# Altium PCB board.PcbDoc
Units mm, origin at the board's own origin, x right, y up, seen from the top; angles counter-clockwise.
Board outline 46.4 x 24.4 mm, 2 copper layers (Top Layer, Bottom Layer), stack 1.57 mm thick; 70 components, 62 nets, 297 pads, 179 vias.
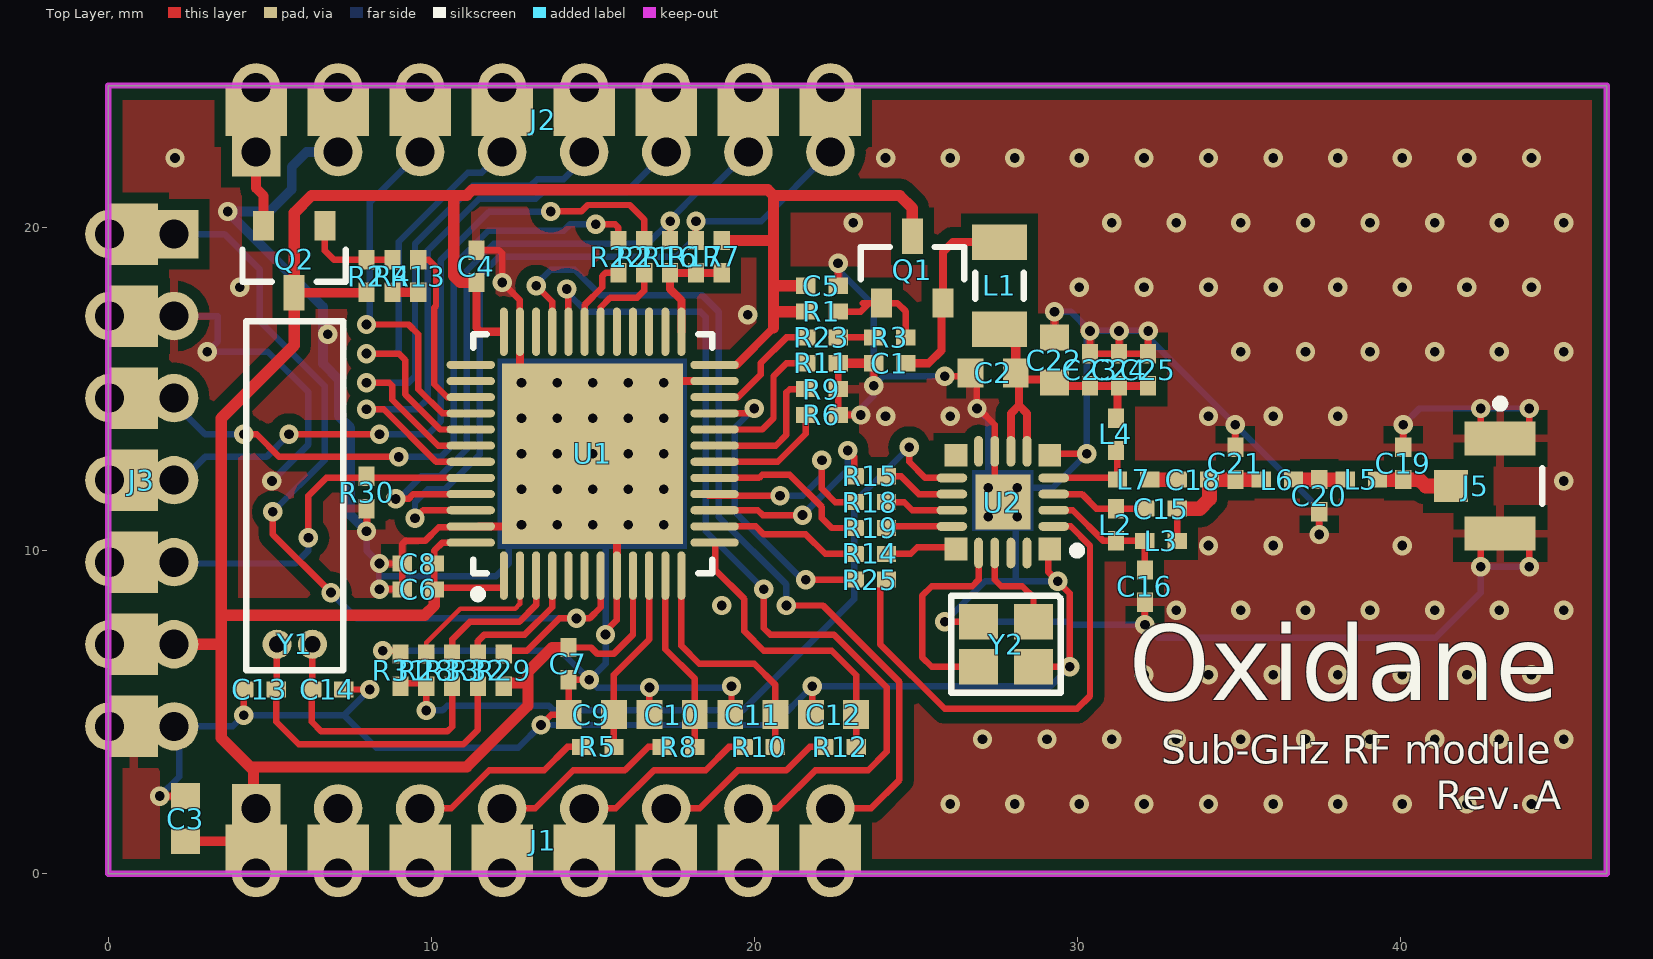
[diagram p0: Top Layer view]
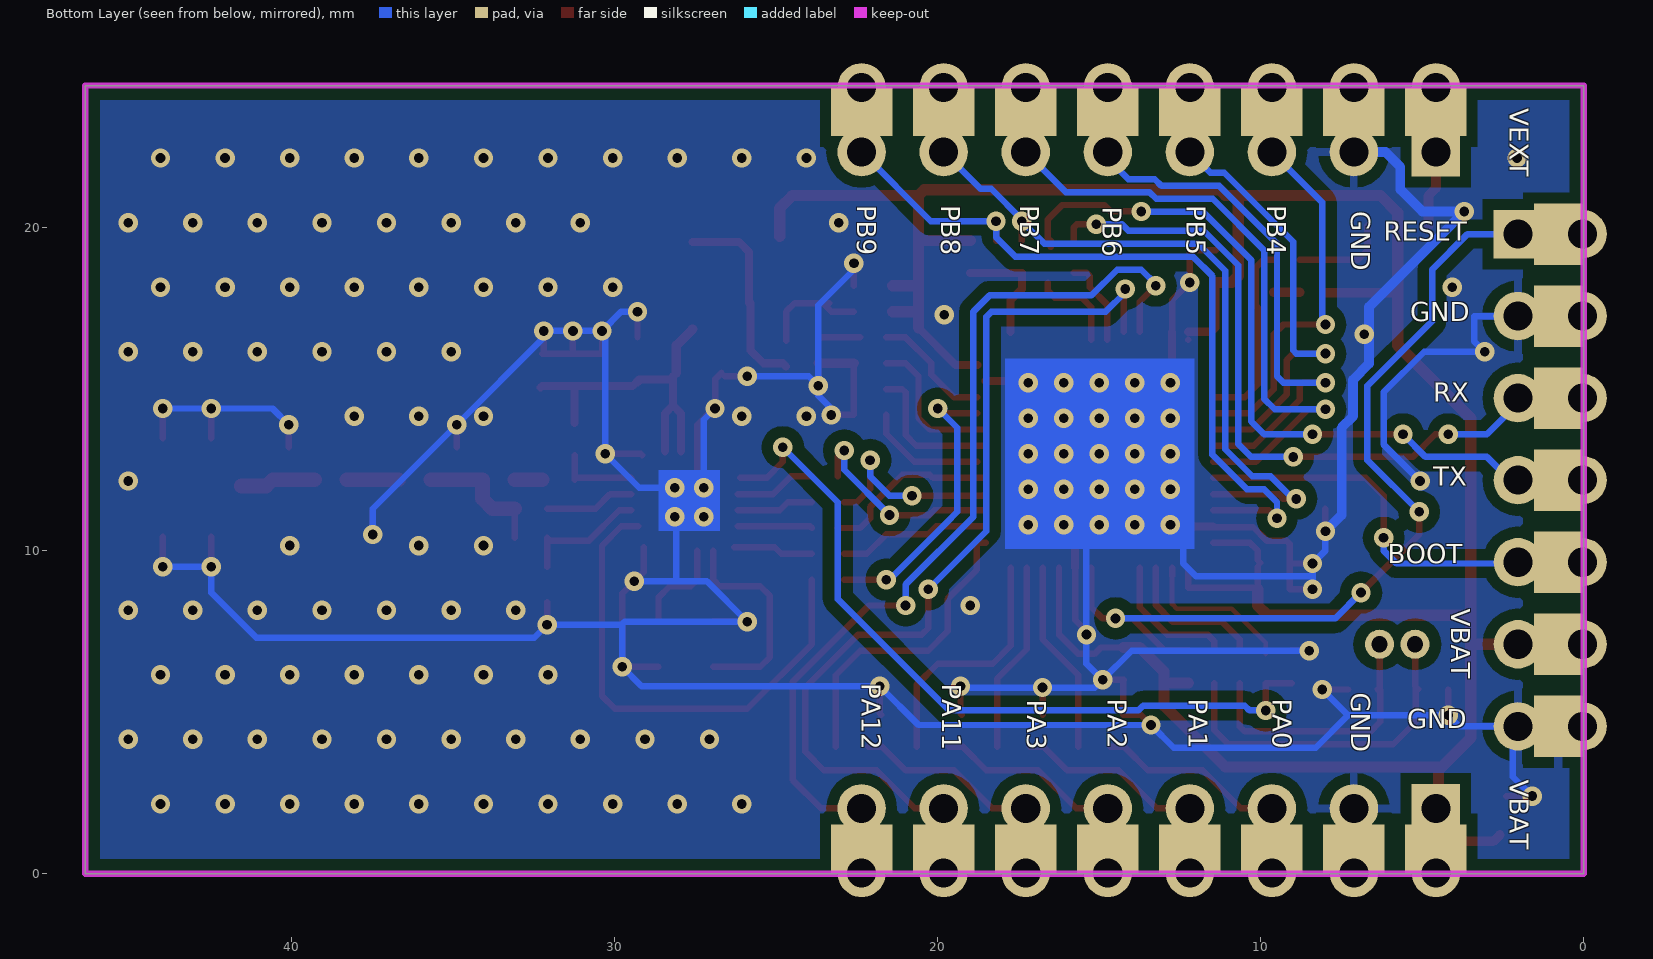
[diagram p1: Bottom Layer view, seen from below]
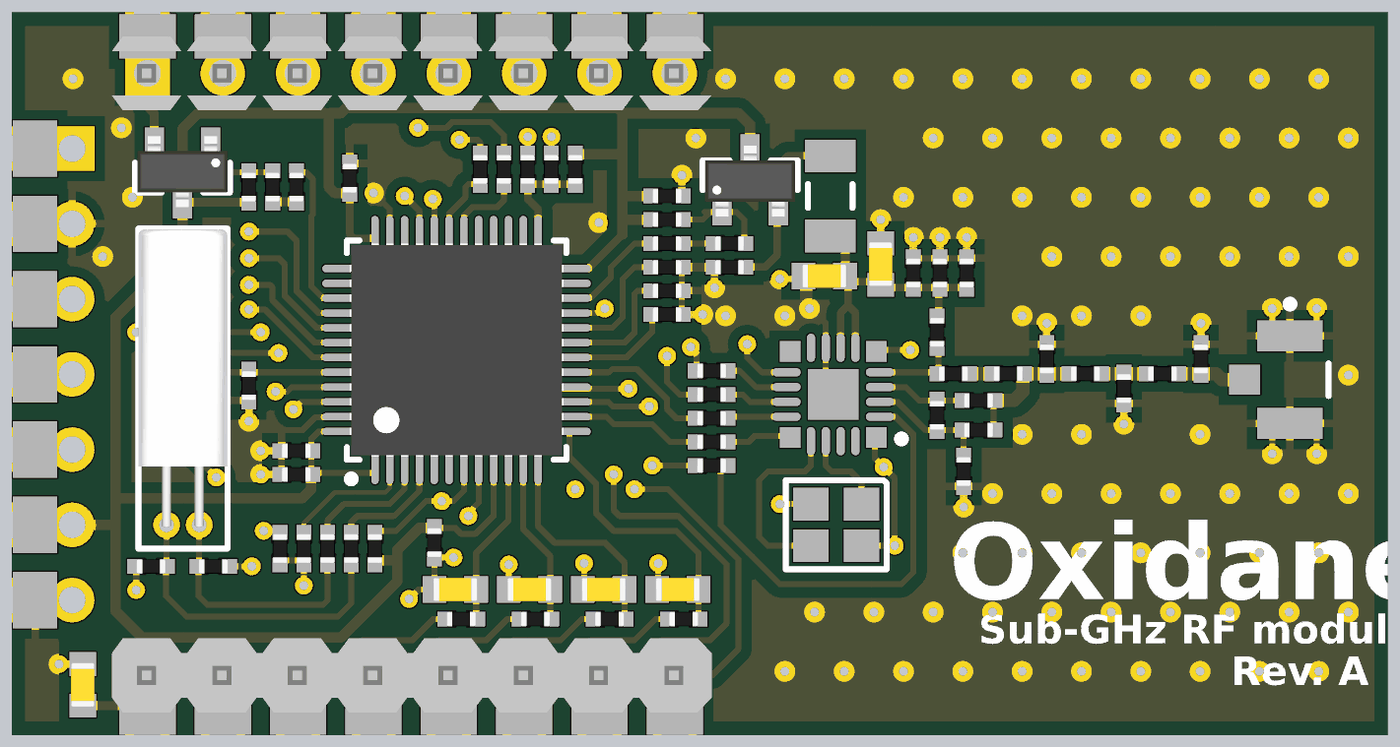
[diagram p2: 3D render of the assembled board from above, using the file's embedded part models]

## Layer stack, top to bottom
Top Solder: solder mask 0.01, Solder Resist, Dk 3.5
Top Layer: signal copper 0.035
Dielectric1: core 1.5, FR-4, Dk 4.2
Bottom Layer: signal copper 0.035
Bottom Solder: solder mask 0.01, Solder Resist, Dk 3.5

## Board outline
0,0 0,24.4 46.4,24.4 46.4,0

## Design rules (kind name [scope] priority, off if disabled: settings)
AssemblyTestPointUsage [All] p1 off:
AssemblyTestpoint [All] p1 off: testpointundercomponent=TRUE minsize=1.016 maxsize=2.54 preferedsize=1.524 minholesize=0 maxholesize=1.016 preferedholesize=0.813 testpointgrid=0.025 usegrid=TRUE gridtolerance=0 allowsidetop=TRUE allowsidebottom=TRUE
Clearance [All] p1: gap=0.2 ignorepadtopadclearanceinfootprint=FALSE except(0.35: Arc-Fill Arc-Poly Arc-Region Track-Fill Track-Poly Track-Region SMDPad-Fill SMDPad-Poly SMDPad-Region THPad-Fill THPad-Poly THPad-Region Via-Fill Via-Poly Via-Region Fill-Fill Fill-Poly Fill-Region Poly-Poly Poly-Region Region-Region)
ComponentClearance ComponentClearance_Headers [InComponent('J1') or InComponent('J2') or InComponent('J3') vs InComponent('J1') or InComponent('J2') or InComponent('J3')] p1: gap=0 collisioncheckmode=3 verticalgap=0.254 showdistances=FALSE
ComponentClearance ComponentClearance_logo [HasFootprint('Develer_logo_30x12mm_PCB_NOTE') vs HasFootprint('Develer_logo_30x12mm_TB_Top')] p2: gap=0 collisioncheckmode=3 verticalgap=0 showdistances=FALSE
ComponentClearance [All] p3: gap=0.25 collisioncheckmode=3 verticalgap=0.25 showdistances=FALSE
DiffPairsRouting [All] p1: maxlimit=0.25 minlimit=0.25 mostfreqgap=0.25 toplayer_minwidth=0.25 toplayer_maxwidth=0.25 toplayer_prefwidth=0.25 bottomlayer_minwidth=0.25 bottomlayer_maxwidth=0.25 bottomlayer_prefwidth=0.25 maxuncoupledlength=12.7
FabricationTestPointUsage [All] p1 off: valid=0 allowmultiple=FALSE
Height [All] p1: minheight=0 maxheight=25 prefheight=12.5
HoleSize [All] p1: absolutevalues=TRUE maxlimit=10 minlimit=0.2 maxpercent=80.000 minpercent=20.000
HoleToHoleClearance [All] p1: gap=0.25 allowstackedmicrovias=TRUE
MinimumSolderMaskSliver [All] p1: minsoldermaskwidth=0.1
PlaneClearance [All] p1: clearance=0.5
PlaneConnect PlaneConnect_via [isvia] p1: planeconnectstyle=Direct reliefexpansion=0.508 reliefentries=4 reliefconductorwidth=0.254 reliefairgap=0.254
PlaneConnect [All] p2: planeconnectstyle=Relief reliefexpansion=0.6 reliefentries=4 reliefconductorwidth=0.6 reliefairgap=0.3
PolygonConnect PolygonConnect_via [isvia] p1: connectstyle=Direct reliefconductorwidth=0.254 reliefentries=4 polygonreliefangle="90 Angle" airgapwidth=0.254
PolygonConnect [All] p2: connectstyle=Relief reliefconductorwidth=0.25 reliefentries=4 polygonreliefangle="90 Angle" airgapwidth=0.35
RoutingCorners [All] p1: cornerstyle=45-Degree minsetback=2.5 maxsetback=2.5
RoutingVias [All] p1: holewidth=0.3 width=0.6 viastyle="Through Hole" minholewidth=0.2 minwidth=0.3 maxholewidth=0.5 maxwidth=1
SilkToSilkClearance [All] p1: silktosilkclearance=0.1
SilkToSolderMaskClearance [IsPad] p1: minsilkscreentomaskgap=0.15 clearancetoexposedcopper=TRUE
SolderMaskExpansion SolderMaskExpansion_via [isVia] p1: expansion=-10
SolderMaskExpansion [All] p2: expansion=0.05
UnRoutedNet [All] p1: checkbadconnections=TRUE
Width [All] p1: maxlimit=5 minlimit=0.15 preferedwidth=0.2
15 further rules are at their usual default settings.

## Classes and differential pairs
component class connectors: C1 C2 J1 J3 L1 Q1 Q2 R1 R2 R3 R4
component class microcontroller: C3 C4 C5 C6 C7 C8 C9 C10 C11 C12 C13 C14 R5 R6 R7 R8 R9 R10 R11 R12 R13 R14 R15 R16 R17 R18 R19 R21 R22 R23 R25 R28 R30 R31 R32 R33 U1 Y1
component class radio: C15 C16 C18 C19 C20 C21 C22 C23 C24 C25 J5 L2 L3 L4 L5 L6 L7 U2 Y2

## Components (designator, comment, footprint, x,y, rotation, side; value= is the part's Value field where it differs from the comment)
C1 "10nF" 0402_[1005] 24.2,15.8 r0 top
C2 "10uF" 0603_[1608] 27.4,15.5 r0 top
C3 "4.7uF" 0603_[1608] 2.4,1.7 r90 top
C4 "100nF" 0402_[1005] 11.4,18.8 r270 top
C5 "100nF" 0402_[1005] 22.1,18.2 r180 top
C6 "100nF" 0402_[1005] 9.6,8.8 r0 top
C7 "100nF" 0402_[1005] 14.25,6.5 r90 top
C8 "100nF" 0402_[1005] 9.6,9.6 r0 top
C9 "NP" 0603_[1608] 14.96,4.92 r180 top value=100nF
C10 "NP" 0603_[1608] 17.46,4.92 r180 top value=100nF
C11 "NP" 0603_[1608] 19.96,4.92 r180 top value=100nF
C12 "NP" 0603_[1608] 22.46,4.92 r180 top value=100nF
C13 "6.8pF" 0402_[1005] 4.7,5.7 r0 top
C14 "6.8pF" 0402_[1005] 6.8,5.7 r180 top
C15 "1.2pF" 0402_[1005] 32.6,11.3 r180 top
C16 "3.0pF" 0402_[1005] 32.1,8.9 r90 top
C18 "33pF" 0402_[1005] 33.6,12.2 r180 top
C19 "5.1pF" 0402_[1005] 40.1,12.7 r270 top
C20 "10pF" 0402_[1005] 37.5,11.7 r90 top
C21 "5.1pF" 0402_[1005] 34.9,12.7 r270 top
C22 "2.2uF" 0603_[1608] 29.3,15.9 r270 top
C23 "100nF" 0402_[1005] 30.4,15.6 r270 top
C24 "100pF" 0402_[1005] 31.3,15.6 r270 top
C25 "33pF" 0402_[1005] 32.2,15.6 r270 top
J1 "Header 8x1" HDR8x1-H#1 13.49,1.895 r0 top
J2 "Header 8x1" HDR8x1-H#2 13.49,22.465 r0 top locked
J3 "Debug" HDR7x1-H 1.84,12.165 r270 top
J5 "u.FL" U.FL_COAXIAL_2.6x2.6MM_STRAIGHT_SMD 43.1,12 r270 top
L1 "10uH" 1206_[3216] 27.6,18.2 r270 top
L2 "18nH" 0402_[1005] 31.2,10.8 r90 top
L3 "22nH" 0402_[1005] 32.6,10.3 r180 top
L4 "120nH" 0402_[1005] 31.2,13.6 r90 top
L5 "6.8nH" 0402_[1005] 38.8,12.2 r180 top
L6 "6.8nH" 0402_[1005] 36.2,12.2 r180 top
L7 "8.2nH" 0402_[1005] 31.75,12.2 r180 top
Q1 "IRLML5103" SOT-23-MOS 24.9,18.7 r90 top
Q2 "IRLML5103" SOT-23-MOS 5.76,19.02 r270 top
R1 "4k7" 0402_[1005] 22.1,17.4 r180 top
R2 "4k7" 0402_[1005] 8,18.5 r270 top
R3 "1k" 0402_[1005] 24.2,16.6 r0 top
R4 "1k" 0402_[1005] 8.8,18.5 r90 top
R5 "0" 0402_[1005] 15.16,3.92 r0 top
R6 "10k" 0402_[1005] 22.1,14.2 r0 top
R7 "NP" 0402_[1005] 19,19.1 r90 top value=0
R8 "0" 0402_[1005] 17.66,3.92 r0 top
R9 "10k" 0402_[1005] 22.1,15 r0 top
R10 "0" 0402_[1005] 20.16,3.92 r0 top
R11 "10k" 0402_[1005] 22.1,15.8 r0 top
R12 "0" 0402_[1005] 22.66,3.92 r0 top
R13 "22" 0402_[1005] 9.6,18.5 r270 top
R14 "22" 0402_[1005] 23.6,9.9 r180 top
R15 "22" 0402_[1005] 23.6,12.3 r180 top
R16 "NP" 0402_[1005] 17.4,19.1 r270 top value=10K
R17 "NP" 0402_[1005] 18.2,19.1 r270 top value=10K
R18 "22" 0402_[1005] 23.6,11.5 r180 top
R19 "22" 0402_[1005] 23.6,10.7 r180 top
R21 "22" 0402_[1005] 16.6,19.1 r270 top
R22 "22" 0402_[1005] 15.8,19.1 r270 top
R23 "22" 0402_[1005] 22.1,16.6 r0 top
R25 "22" 0402_[1005] 23.6,9.1 r0 top
R28 "22" 0402_[1005] 9.85,6.3 r270 top
R29 "10k" 0402_[1005] 12.25,6.3 r90 top
R30 "10k" 0402_[1005] 8,11.8 r90 top
R31 "10k" 0402_[1005] 9.05,6.3 r270 top
R32 "0" 0402_[1005] 11.45,6.3 r270 top
R33 "0" 0402_[1005] 10.65,6.3 r90 top
U1 "STM32L15xCxx6" QFN50P700X700X60_HS-49N 15,13 r90 top locked
U2 "Si4455" QFN50P300X300X90_HS-21N 27.7,11.5 r180 top
Y1 "32.768 KHz" KX-38 5.875,11.6 r90 top
Y2 "26MHz" CRYSTAL_2.5X2MM_4P_SMD 27.8,7.1 r180 top

## Footprints (in the part's own frame and the unit in brackets; to place one, negate y for a bottom-side part, rotate by r counter-clockwise, add the part's x,y. Pads: shape width x height; smd on the part's side, far side on the other; paste and mask are expansions set on the pad)
0402_[1005] [mm] "Chip Capacitor, Body 1.0x0.5mm, IPC High Density"
  rect 0.6x0.5 smd: 1(-0.5,0) 2(0.5,0)
  body extent -0.5,-0.25 0.5,0.25, height 0.42
0603_[1608] [mm] "Chip Capacitor, Body 1.6x0.8mm, IPC High Density"
  rect 0.8x0.9 smd: 1(-0.7,0) 2(0.7,0)
  body extent -0.75,-0.4 0.75,0.4, height 0.67
1206_[3216] [mm] "Chip Capacitor, Body 3.2x1.6mm, IPC High Density"
  rect 1.1x1.7 smd: 1(-1.35,0) 2(1.35,0)
  silkscreen extent -0.4,-0.75 0.4,0.75, body extent -1.7,-0.9 1.7,0.9, height 1.3
CRYSTAL_2.5X2MM_4P_SMD [mm] "quarz crystal smd 4 lead"
  rect 1.2x1.1 smd: 1(-0.85,-0.7) 2(0.85,-0.7) 3(0.85,0.7) 4(-0.85,0.7)
  silkscreen extent -1.7,-1.5 1.7,1.5, body extent -1.27,-0.92 1.23,1.08, height 1.25
HDR7x1-H [mm] "Header 7x1, THD, dual-line with half-cut holes"
  round 1.5 hole 0.9: 1(-7.635,-1.8) 2(-5.095,-1.8) 2(-5.095,0.2) 3(-2.555,0.2) 3(-2.555,-1.8) 4(-0.015,0.2) 4(-0.015,-1.8) 5(2.525,0.2) 5(2.525,-1.8) 6(5.065,-1.8) 6(5.065,0.2) 7(7.605,-1.8) 7(7.605,0.2)
  rect 1.9x1.5 smd: 1(-7.635,-1.05) 2(-5.095,-1.05) 3(-2.555,-1.05) 4(-0.015,-1.05) 5(2.525,-1.05) 6(5.065,-1.05) 7(7.605,-1.05)
  rect 1.9x1.5 smd far side: 1(-7.635,-1.05) 2(-5.095,-1.05) 3(-2.555,-1.05) 4(-0.015,-1.05) 5(2.525,-1.05) 6(5.065,-1.05) 7(7.605,-1.05)
  rect 1.5x1.5 hole 0.9: 1(-7.635,0.2)
HDR8x1-H#1 [mm] "Header 8x1, THD, dual-line with half-cut holes"
  round 1.5 hole 0.9: 1(-8.91,-1.875) 2(-6.37,-1.875) 2(-6.37,0.125) 3(-3.83,-1.875) 3(-3.83,0.125) 4(-1.29,-1.875) 4(-1.29,0.125) 5(1.25,-1.875) 5(1.25,0.125) 6(3.79,-1.875) 6(3.79,0.125) 7(6.33,-1.875) 7(6.33,0.125) 8(8.87,-1.875) 8(8.87,0.125)
  rect 1.9x1.5 smd: 1(-8.91,-1.125) 2(-6.37,-1.125) 3(-3.83,-1.125) 4(-1.29,-1.125) 5(1.25,-1.125) 6(3.79,-1.125) 7(6.33,-1.125) 8(8.87,-1.125)
  rect 1.9x1.5 smd far side: 1(-8.91,-1.125) 2(-6.37,-1.125) 3(-3.83,-1.125) 4(-1.29,-1.125) 5(1.25,-1.125) 6(3.79,-1.125) 7(6.33,-1.125) 8(8.87,-1.125)
  rect 1.5x1.5 hole 0.9: 1(-8.91,0.125)
  body extent -10.11,-1.12 10.11,1.38, height 8.2
HDR8x1-H#2 [mm] "Header 8x1, THD, dual-line with half-cut holes"
  rect 1.5x1.5 hole 0.9: 1(-8.91,-0.125)
  rect 1.9x1.5 smd far side: 1(-8.91,1.125) 2(-6.37,1.125) 3(-3.83,1.125) 4(-1.29,1.125) 5(1.25,1.125) 6(3.79,1.125) 7(6.33,1.125) 8(8.87,1.125)
  rect 1.9x1.5 smd: 1(-8.91,1.125) 2(-6.37,1.125) 3(-3.83,1.125) 4(-1.29,1.125) 5(1.25,1.125) 6(3.79,1.125) 7(6.33,1.125) 8(8.87,1.125)
  round 1.5 hole 0.9: 1(-8.91,1.875) 2(-6.37,-0.125) 2(-6.37,1.875) 3(-3.83,-0.125) 3(-3.83,1.875) 4(-1.29,-0.125) 4(-1.29,1.875) 5(1.25,-0.125) 5(1.25,1.875) 6(3.79,-0.125) 6(3.79,1.875) 7(6.33,-0.125) 7(6.33,1.875) 8(8.87,-0.125) 8(8.87,1.875)
  body extent -10.11,-1.38 10.11,1.12, height 3
KX-38 [mm] "Through-hole cylindrical quartz crystal"
  round 0.9 hole 0.5: 1(-4.5,0.65) 2(-4.5,-0.45)
  silkscreen extent -5.3,-1.4 5.5,1.6, body extent -4.67,-1.39 5.47,1.6, height 3.22
QFN50P300X300X90_HS-21N [mm] "QFN, 20-Leads, Body 3.00x3.00mm, Pitch 0.50mm, Thermal Pad 1.70x1.70mm, IPC Medium Density"
  rect 0.7x0.7 smd: 1(-1.45,1.45) 6(-1.45,-1.45) 11(1.45,-1.45) 16(1.45,1.45)
  oval 0.95x0.275 smd: 2(-1.575,0.75) 3(-1.575,0.25) 4(-1.575,-0.25) 5(-1.575,-0.75) 12(1.575,-0.75) 13(1.575,-0.25) 14(1.575,0.25) 15(1.575,0.75)
  oval 0.275x0.95 smd: 7(-0.75,-1.575) 8(-0.25,-1.575) 9(0.25,-1.575) 10(0.75,-1.575) 17(0.75,1.575) 18(0.25,1.575) 19(-0.25,1.575) 20(-0.75,1.575)
  rect 1.7x1.7 smd: 21(0,0)
  silkscreen extent -2.43,1.38 -2.18,1.62, body extent -1.5,-1.5 1.5,1.5, height 0.9
QFN50P700X700X60_HS-49N [mm] "QFN, 48-Leads, Body 7,00x7,00mm, Pitch 0,50mm, Thermal Pad 5,60x5,60mm, IPC Medium Density"
  oval 1.5x0.25 smd: 1(-3.775,2.75) 2(-3.775,2.25) 3(-3.775,1.75) 4(-3.775,1.25) 5(-3.775,0.75) 6(-3.775,0.25) 7(-3.775,-0.25) 8(-3.775,-0.75) 9(-3.775,-1.25) 10(-3.775,-1.75) 11(-3.775,-2.25) 12(-3.775,-2.75) 25(3.775,-2.75) 26(3.775,-2.25) 27(3.775,-1.75) 28(3.775,-1.25) 29(3.775,-0.75) 30(3.775,-0.25) 31(3.775,0.25) 32(3.775,0.75) 33(3.775,1.25) 34(3.775,1.75) 35(3.775,2.25) 36(3.775,2.75)
  oval 0.25x1.5 smd: 13(-2.75,-3.775) 14(-2.25,-3.775) 15(-1.75,-3.775) 16(-1.25,-3.775) 17(-0.75,-3.775) 18(-0.25,-3.775) 19(0.25,-3.775) 20(0.75,-3.775) 21(1.25,-3.775) 22(1.75,-3.775) 23(2.25,-3.775) 24(2.75,-3.775) 37(2.75,3.775) 38(2.25,3.775) 39(1.75,3.775) 40(1.25,3.775) 41(0.75,3.775) 42(0.25,3.775) 43(-0.25,3.775) 44(-0.75,3.775) 45(-1.25,3.775) 46(-1.75,3.775) 47(-2.25,3.775) 48(-2.75,3.775)
  rect 5.6x5.6 smd: 49(0,0)
  silkscreen extent -4.47,-3.7 3.7,3.7, body extent -3.6,-3.6 3.6,3.6, height 0.6
SOT-23-MOS [mm] "SOT23, 3-Leads, Body 2.9x1.3mm, Pitch 0.95mm, Lead Span 2.5mm, IPC High Density"
  rect 0.9x0.65 smd: 1(-1.038,0.95) 3(-1.038,-0.95)
  rect 1.1x0.65 smd: 2(1.038,0)
  silkscreen extent -0.3,-1.6 0.7,1.6, body extent -1.2,-1.52 1.2,1.52, height 1.22
U.FL_COAXIAL_2.6x2.6MM_STRAIGHT_SMD [mm] "SMD, 3-Leads, Body 2.6x2.6mm (HRS-U.FL-R-SMT-1(10)_V)"
  rect 1.05x2.2 smd: 1(-1.475,0) 2(1.475,0)
  rect 1x1.05 smd: 3(0,-1.525)
  silkscreen extent -2.67,-0.12 0.55,1.3, body extent -1.3,-1.3 1.3,1.3, height 1.25

## Part data
C1 C2 C4 C5 C6 C7 C8 C9 C10 C11 C12 C13 C14 C15 C16 C18 C19 C20 C21 C22 C23 C24 C25: library part C, "Capacitor"
C3: library part CPOL, "Polarized capacitor"
J1 J2: library part "HDR 8x1", "Pin header, 8x1"
J3: library part "HDR 7x1", "Pin header, 7x1"
J5: "u.FL antenna connector"
L1 L2 L3 L4 L5 L6 L7: library part L, "Inductor"
Q1 Q2: library part PMOS, "P-channel MOSFET"
R1 R2 R3 R4 R5 R6 R7 R8 R9 R10 R11 R12 R13 R14 R15 R16 R17 R18 R19 R21 R22 R23 R25 R28 R29 R30 R31 R32 R33: library part R, "Resistor"
U1: "Ultra-low-power 32-bit MCU ARM®-based Cortex®-M3, 128KB Flash, 16KB SRAM, 4KB EEPROM, LCD, USB, ADC, DAC"
U2: "Low-current OOK/(G)FSK sub-GHz transceiver"
Y1: library part XTAL, "Crystal oscillator"
Y2: library part XTAL-4, "Crystal oscillator, 4-pin"

## Via types
v1: diameter 0.6, hole 0.3, Top Layer to Bottom Layer, 179 vias

## Nets (pads, with @x,y where several pads share a name; then routed paths per layer and width w, separated by ;. In a path a pad name is that pad's centre, name@x,y a point inside that pad or via, vN(x,y) a via of type N, cw(c..) or ccw(c..) an arc to the next point about the centre after c; other vN are vias at no path point)
BOOT0: J3.5 R30.2 U1.44 | length 11.4
  Top Layer w0.2: v1(6.2,10.4) 6.2,11.7 6.75,12.25 U1.44@11.475,12.25
  Bottom Layer w0.2: J3.5@2.165,9.6 5.8,9.6 6.2,10 v1(6.2,10.4)
DRX: J3.3 R22.1 | length 21.3
  Top Layer w0.2: v1(4.2,13.6) 4.6,13.6 5.3,12.9 v1(9,12.9) ; v1(15.1,20.1) 15.7,20.1 15.8,20 R22.1
  Bottom Layer w0.2: J3.3@2.04,14.72 2.04,14.56 3,13.6 v1(4.2,13.6) ; v1(9,12.9) 10.3,12.9 10.7,13.3 10.7,18.831 11.769,19.9 14.1,19.9 14.3,20.1 v1(15.1,20.1)
DTX: J3.4 R21.1 | length 22.1
  Top Layer w0.2: v1(5.6,13.6) v1(8.4,13.6) ; v1(13.7,20.5) 14.651,20.5 14.851,20.7 16.149,20.7 16.6,20.249 R21.1 ; R21.1@16.5,19.4 R21.1@16.5,19.6
  Bottom Layer w0.2: J3.4@2.04,12.18 2.28,12.18 3,12.9 4.9,12.9 v1(5.6,13.6) ; v1(8.4,13.6) 9.9,13.6 10.3,14 10.3,18.997 11.793,20.49 13.69,20.49 v1(13.7,20.5)
GND: C1.1 C2.1 C3.2 C4.1 C5.1 C6.1 C7.1 C8.1 C9.2 C10.2 C11.2 C12.2 C13.1 C14.1 C16.1 C19.1 C20.1 C21.1 C22.1 C23.1 C24.1 C25.1 J1.2 J2.2 J3.2 J3.7 J5.1 J5.2 R6.2 R9.2 R11.2 R30.1 R31.1 U1.8 U1.23 U1.35 U1.47 U1.49 U2.1 U2.6 U2.9 U2.21 Y2.2 Y2.4 | length 209.7
  Top Layer w0.2: v1(1.6,2.4) C3.2 ; v1(4.2,4.9) C13.1 ; C14.1 v1(8.1,5.7) ; v1(8,10.6) R30.1 ; v1(8.4,8.8) C6.1 C8.1 ; v1(8.4,9.6) C8.1 ; v1(8.5,6.9) R31.1@9.05,6.9 ; C4.1 12.1,19.3 12.2,19.2 v1(12.2,18.3) 12.75,17.75 U1.35 ; U1.47@11.475,10.75 11.45,10.725 10.238,10.725 9.813,10.3 9.2,10.3 9.1,10.2 C8.1 ; U1.49@12.75,15.25 v1(12.8,15.2) ; v1(12.8,10.8) v1(13.9,11.9) v1(15,13) ; v1(13.4,4.6) 13.72,4.92 C9.2 14.26,5.99 C7.1 v1(14.9,6) ; v1(13.9,14.1) v1(15,13) ; v1(15.4,7.4) 15.4,7.5 15.75,7.85 U1.8 U1.8@15.75,9.475 ; v1(16.1,14.1) v1(15,13) ; C10.2 v1(16.76,5.76) ; v1(17.2,15.2) U1.49@17.25,15.25 ; C11.2 19.3,4.96 v1(19.3,5.8) ; C12.2 21.8,4.96 v1(21.8,5.8) ; R11.2 R9.2 R6.2 v1(23.3,14.2) ; C5.1 v1(22.6,18.9) ; v1(23.7,15.1) C1.1 ; v1(25.9,7.8) Y2.2 ; v1(25.9,15.4) C2.1@26.6,15.4 ; C2.1 26.9,15.3 v1(26.9,14.4) 26.95,14.4 27.45,13.9 U2.9 27.45,11.75 U2.21 ; Y2.4 v1(29.775,6.4) 29.775,8.675 v1(29.4,9.05) 29.1,9.35 U2.1@29.1,10.1 ; U2.6 29.2,13 v1(30.3,13) ; C22.1 v1(29.3,17.4) ; C23.1 v1(30.4,16.8) ; C23.1@30.45,16.1 C24.1 ; v1(31.3,16.8) C24.1 ; v1(32.1,7.7) C16.1 ; v1(32.2,16.8) C25.1 ; C25.1@32.25,16.1 C25.1 ; C21.1 v1(34.9,13.9) ; v1(37.5,10.5) C20.1 ; C19.1 v1(40.1,13.9) ; v1(42.5,9.5) J5.2@42.5,10.425 ; J5.1@42.5,13.475 v1(42.5,14.4) ; v1(44,9.5) J5.2@44,10.425 ; J5.1@44,13.475 v1(44,14.4) ; C24.1 C25.1
  Top Layer w0.25: U1.47@11.475,10.75 12.75,10.75 v1(12.8,10.8) ; U1.49@12.75,15.25 U1.35 ; v1(12.8,15.2) v1(13.9,14.1) ; v1(15,13) 15.75,12.25 U1.8@15.75,9.475 ; v1(16.1,14.1) v1(17.2,15.2) ; U1.49@17.25,15.25 U1.23@18.525,15.25
  Top Layer w0.3: R11.2 C1.1
  Bottom Layer w0.2: v1(1.6,2.4) 2.2,3 2.2,4.4 2.04,4.56 3.86,4.56 v1(4.2,4.9) 7.3,4.9 ; J3.2@2.04,17.26 3.4,17.26 3.4,16.485 v1(3.07,16.155) 4.945,16.155 6.2,14.9 6.2,13.285 v1(5.07,12.155) ; v1(8,10.6) 8,10 v1(8.4,9.6) 8.4,9.2 ; v1(8.1,5.7) 7.3,4.9 ; v1(8.4,8.8) 8.4,9.2 ; v1(8.5,6.9) 14,6.9 v1(14.9,6) ; 12.4,11 12.4,9.6 12,9.2 8.4,9.2 ; 15.6,11.3 15.4,11.1 v1(15.4,7.4) 15.4,6.5 v1(14.9,6) ; v1(19.3,5.8) 19.26,5.76 v1(16.76,5.76) 15.14,5.76 v1(14.9,6) ; v1@22.4,18.9 23.7,17.6 v1(23.7,15.1) ; v1@23.1,14.2 23.7,14.8 v1(23.7,15.1) ; v1(25.9,15.4) 24,15.4 v1(23.7,15.1) ; v1(26.9,14.4) 27.25,14.05 v1(27.25,11.95) ; v1(29.3,17.4) 29.8,17.4 v1(30.4,16.8) ; v1(29.4,9.05) 28.1,9.05 ; v1(37.5,10.5) 37.5,11.3 v1(34.9,13.9) 32.2,16.6 v1(32.2,16.8) v1(30.4,16.8) ; v1(40.1,13.9) 40.6,14.4 v1(42.5,14.4) v1(44,14.4) ; v1(44,9.5) v1(42.5,9.5) 42.5,8.7 41.1,7.3 32.5,7.3 v1(32.1,7.7) 29.775,7.7 ; 7.3,4.9 8.3,3.9 12.7,3.9 v1(13.4,4.6) 20.6,4.6 v1(21.8,5.8) 29.175,5.8 v1(29.775,6.4) 29.775,7.7 ; 28.1,9.05 28.1,11.9 v1(28.15,11.95) 29.25,11.95 v1(30.3,13) 30.3,16.7 v1(30.4,16.8) ; 28.1,9.05 27.15,9.05 v1(25.9,7.8) 29.7,7.8 29.775,7.725 29.775,7.7
  Bottom Layer w0.3: J2.2@7.12,22.34 6.14,22.34 5.68,21.88 5.68,21.18 5,20.5 v1(3.7,20.5) 6.65,17.55 6.65,15.786 7.15,15.286 7.15,14.155 7.5,13.805 7.5,11.1 v1(8,10.6)
  other v1: 26.07,2.155 28.07,2.155 30.07,2.155 32.07,2.155 34.07,2.155 36.07,2.155 38.07,2.155 40.07,2.155 42.07,2.155 44.07,2.155 27.07,4.155 29.07,4.155 31.07,4.155 33.07,4.155 35.07,4.155 37.07,4.155 39.07,4.155 41.07,4.155 43.07,4.155 45.07,4.155 32.07,6.155 34.07,6.155 36.07,6.155 38.07,6.155 40.07,6.155 42.07,6.155 44.07,6.155 33.07,8.155 35.07,8.155 37.07,8.155 39.07,8.155 41.07,8.155 43.07,8.155 45.07,8.155 19,8.3 34.07,10.155 36.07,10.155 40.07,10.155 13.9,10.8 15,10.8 16.1,10.8 17.2,10.8 27.25,11.05 28.15,11.05 12.8,11.9 15,11.9 16.1,11.9 17.2,11.9 45.07,12.155 12.8,13 13.9,13 16.1,13 17.2,13 12.8,14.1 15,14.1 17.2,14.1 24.07,14.155 26.07,14.155 34.07,14.155 36.07,14.155 38.07,14.155 13.9,15.2 15,15.2 16.1,15.2 35.07,16.155 37.07,16.155 39.07,16.155 41.07,16.155 43.07,16.155 45.07,16.155 6.8,16.7 19.8,17.3 4.07,18.155 30.07,18.155 32.07,18.155 34.07,18.155 36.07,18.155 38.07,18.155 40.07,18.155 42.07,18.155 44.07,18.155 23.07,20.155 31.07,20.155 33.07,20.155 35.07,20.155 37.07,20.155 39.07,20.155 41.07,20.155 43.07,20.155 45.07,20.155 2.07,22.155 24.07,22.155 26.07,22.155 28.07,22.155 30.07,22.155 32.07,22.155 34.07,22.155 36.07,22.155 38.07,22.155 40.07,22.155 42.07,22.155 44.07,22.155
NetC1_2: C1.2 L1.1 Q1.3 | length 6.2
  Top Layer w0.25: C1.2@24.7,15.7 24.8,15.8 25.4,15.8 25.8,16.2 25.8,16.9 Q1.3@25.8,17.662 ; Q1.3 25.85,19.25 26.15,19.55 L1.1
NetC9_1: C9.1 R5.2 U1.10 | length 6
  Top Layer w0.2: R5.2 C9.1 15.66,6.16 16.75,7.25 U1.10@16.75,9.475
NetC10_1: C10.1 R8.2 U1.11 | length 5.9
  Top Layer w0.2: U1.11@17.25,9.475 17.25,6.95 18.16,6.04 C10.1 R8.2
NetC11_1: C11.1 R10.2 U1.12 | length 7.8
  Top Layer w0.2: U1.12@17.75,9.475 17.75,7.05 18.3,6.5 20,6.5 20.66,5.84 C11.1 R10.2
NetC12_1: C12.1 R12.2 U1.13 | length 9.6
  Top Layer w0.2: U1.13@18.525,10.25 U1.13 18.8,10.225 18.8,9.4 19.7,8.5 19.7,7.5 20.3,6.9 22.4,6.9 23.16,6.14 C12.1 R12.2
NetC13_2: C13.2 R32.2 Y1.1 | length 10.6
  Top Layer w0.2: C13.2@5.125,5.7 5.225,5.8 Y1.1 ; C13.2 5.2,4.7 5.9,4 11,4 11.45,4.45 R32.2@11.45,5.9
NetC14_2: C14.2 R33.1 Y1.2 | length 8.4
  Top Layer w0.2: C14.2@6.3,5.625 6.375,5.7 6.325,5.75 Y1.2 ; C14.2 6.3,4.7 6.6,4.4 10.5,4.4 10.65,4.55 R33.1@10.65,5.9
NetC15_1: C15.1 C18.1 C21.2 L3.1 L6.2 | length 4.2
  Top Layer w0.2: L3.1@33.1,10.4 C15.1
  Top Layer w0.45: C15.1 33.8,11.3 34.1,11.6 C18.1 L6.2
NetC15_2: C15.2 L2.2 U2.4 | length 2.8
  Top Layer w0.2: U2.4@29.5,11.75 30.15,11.75 30.6,11.3 L2.2 C15.2
NetC16_2: C16.2 L2.1 L3.2 U2.3 | length 3.9
  Top Layer w0.2: U2.3@29.5,11.25 29.866,11.25 30.816,10.3 L2.1 32,10.3 32.1,10.4 L3.2 C16.2@32.1,9.5
NetC18_2: C18.2 L7.1 | length 0.9
  Top Layer w0.45: L7.1 C18.2
NetC19_2: C19.2 J5.3 L5.1 | length 2.5
  Top Layer w0.2: J5.3@41.475,12.1 J5.3
  Top Layer w0.45: L5.1 C19.2 40.6,12.2 40.8,12 J5.3
NetC20_2: C20.2 L5.2 L6.1 | length 1.6
  Top Layer w0.45: L6.1 C20.2 L5.2
NetL4_1: L4.1 L7.2 U2.5 | length 2.5
  Top Layer w0.2: U2.5@29.5,12.25 31.2,12.25 L7.2 L4.1@31.25,12.95
NetQ1_1: Q1.1 R1.1 R3.2 | length 3.4
  Top Layer w0.2: R1.1 23.3,17.4 23.562,17.662 ; 23.362,17.662 Q1.1 24.438,17.662 24.7,17.4 R3.2 R3.2@24.7,16.5
NetQ2_1: Q2.1 R2.1 R4.2 | length 3
  Top Layer w0.2: Q2.1 6.71,19.29 7,19 R2.1 R4.2
NetR6_1: R6.1 U1.18 | length 3.8
  Top Layer w0.2: U1.18 20.731,12.75 21.6,13.619 R6.1
NetR9_1: R9.1 U1.19 | length 4.6
  Top Layer w0.2: U1.19@18.525,13.25 U1.19 20.666,13.25 21,13.584 21,14.9 21.1,15 R9.1
NetR11_1: R11.1 U1.20 | length 4.7
  Top Layer w0.2: U1.20@18.525,13.75 U1.20 20.25,13.75 20.6,14.1 20.6,15.4 21,15.8 R11.1
NetR13_1: R13.1 U1.39 | length 5.8
  Top Layer w0.2: R13.1 9.925,19 10.15,18.775 10.15,17.576 10.1,17.526 10.1,15.149 10.499,14.75 U1.39 U1.39@11.475,14.75
NetR14_2: R14.2 U1.14 | length 4.7
  Top Layer w0.2: U1.14@18.525,10.75 U1.14 20.05,10.75 20.3,10.5 21.6,10.5 22.2,9.9 R14.2@22.9,9.9
NetR15_2: R15.2 U1.15 | length 6.5
  Top Layer w0.2: U1.15@18.525,11.25 20.116,11.25 20.266,11.1 v1(21.5,11.1) ; v1(22.9,13.1) 23.1,12.9 R15.2
  Bottom Layer w0.2: v1(21.5,11.1) 22.9,12.5 v1(22.9,13.1)
NetR18_2: R18.2 U1.16 | length 6.2
  Top Layer w0.2: U1.16@18.525,11.75 18.575,11.7 v1(20.8,11.7) ; v1(22.1,12.8) 22.1,11.914 22.514,11.5 R18.2@22.9,11.5
  Bottom Layer w0.2: v1(20.8,11.7) 21.5,11.7 22.1,12.3 v1(22.1,12.8)
NetR19_2: R19.2 U1.17 | length 5.5
  Top Layer w0.2: U1.17@18.525,12.25 U1.17 20.15,12.25 20.25,12.35 21.099,12.35 22.1,11.349 22.1,11 22.4,10.7 R19.2
NetR21_2: R21.2 U1.30 | length 2.8
  Top Layer w0.2: U1.30@15.25,16.525 U1.30 15.25,17.536 15.539,17.825 16.375,17.825 16.6,18.05 16.6,18.3
NetR22_2: R22.2 U1.31 | length 2.7
  Top Layer w0.2: U1.31@14.75,16.525 U1.31 14.75,17.601 15.3,18.151 15.3,18.5 15.4,18.6 R22.2
NetR23_1: R23.1 U1.22 | length 3.8
  Top Layer w0.2: U1.22 19.501,14.75 20.2,15.449 20.2,15.8 21,16.6 R23.1
NetR25_1: R25.1 U1.21 | length 9.1
  Top Layer w0.2: U1.21 19.85,14.25 v1(20,14.4) ; v1(21.6,9.1) R25.1@22.9,9.1
  Bottom Layer w0.2: v1@19.8,14.4 19.9,14.3 19.4,13.8 19.4,11.2 19.751,10.849 21.5,9.1 v1(21.6,9.1)
NetR28_1: R28.1 U1.2 | length 4.9
  Top Layer w0.15: R28.1 9.85,7.15 10.9,8.2 12.6,8.2 12.75,8.35 U1.2
  Top Layer w0.2: U1.2 U1.2@12.75,9.475
NetR32_1: R32.1 U1.4 | length 4.3
  Top Layer w0.2: R32.1@11.45,6.9 11.45,7.2 11.65,7.4 12.9,7.4 13.75,8.25 U1.4 U1.4@13.75,9.475
NetR33_2: R33.2 U1.3 | length 4.6
  Top Layer w0.2: R33.2@10.65,6.9 10.65,7.25 11.2,7.8 12.734,7.8 13.25,8.316 U1.3 U1.3@13.25,9.475
NetU2_17: U2.17 Y2.3 | length 6.6
  Top Layer w0.2: Y2.3 25.5,6.4 25.2,6.7 25.2,8.6 25.5,8.9 26.75,8.9 26.95,9.1 U2.17 U2.17@26.95,10
NetU2_18: U2.18 Y2.1 | length 3.1
  Top Layer w0.2: U2.18@27.45,10 U2.18 27.45,9.1 27.65,8.9 28.3,8.9 28.65,8.55 Y2.1
PA0-AN0: J1.3 R5.1 | length 5.8
  Top Layer w0.2: J1.3@9.66,2.02 10.62,2.02 11.8,3.2 13.5,3.2 14.22,3.92 R5.1
PA1-AN1: J1.4 R8.1 | length 5.7
  Top Layer w0.2: J1.4@12.2,2.02 13.22,2.02 14.4,3.2 16,3.2 16.72,3.92 R8.1
PA2-AN2: J1.5 R10.1 | length 5.7
  Top Layer w0.2: J1.5@14.74,2.02 15.72,2.02 16.9,3.2 18.5,3.2 19.22,3.92 R10.1
PA3-AN3: J1.6 R12.1 | length 5.7
  Top Layer w0.2: J1.6@17.28,2.02 18.32,2.02 19.5,3.2 21,3.2 21.72,3.92 R12.1
PA11: J1.7 U1.32 | length 28.1
  Top Layer w0.2: v1(14.2,18.1) 14.25,18.05 U1.32 ; J1.7@19.82,2.02 20.72,2.02 21.9,3.2 23.53,3.2 24.1,3.77 24.1,5.766 22.466,7.4 20.5,7.4 20.3,7.6 v1(20.3,8.8)
  Bottom Layer w0.2: v1@14.3,18.2 v1(14.2,18.1) 14.2,18 14.808,17.392 18.342,17.392 18.5,17.234 18.5,10.6 v1(20.3,8.8)
PA12: J1.8 U1.33 | length 28
  Top Layer w0.2: v1(13.251,18.2) 13.75,17.701 U1.33 ; v1(21,8.3) 22.131,8.3 24.5,5.931 24.5,2.9 23.62,2.02 J1.8@22.36,2.02
  Bottom Layer w0.2: v1(13.251,18.2) 13.251,18.251 13.7,18.7 14.449,18.7 15.249,17.9 18.4,17.9 18.9,17.4 18.9,11.049 21,8.949 v1(21,8.3)
PB4: J2.3 U1.40 | length 11.6
  Top Layer w0.2: v1(8,17) 9.3,17 9.6,16.7 9.6,15 10.35,14.25 U1.40 U1.40@11.475,14.25
  Bottom Layer w0.2: v1(8,17) 8.1,17.1 8.1,20.78 J2.3@9.66,22.34
PB5: J2.4 U1.41 | length 13.8
  Top Layer w0.2: v1(8,16.1) 9,16.1 9.2,15.9 9.2,15.266 9.2,14.834 10.284,13.75 U1.41 U1.41@11.475,13.75
  Bottom Layer w0.2: v1(8,16.1) 8.9,16.1 9,16.2 9,19.566 11.134,21.7 11.56,21.7 J2.4@12.2,22.34
PB6: J2.5 U1.42 | length 16.8
  Top Layer w0.2: v1(8,15.2) 8.7,15.2 8.8,15.1 8.8,14.669 10.219,13.25 U1.42@11.475,13.25
  Bottom Layer w0.2: v1(8,15.2) 9.3,15.2 9.5,15.4 9.5,19.5 11.29,21.29 13.076,21.29 13.286,21.5 14.1,21.5 14.74,22.14 J2.5@14.74,22.34
PB7: J2.6 U1.43 | length 19.6
  Top Layer w0.2: v1(8,14.374) 8.529,14.374 10.153,12.75 U1.43@11.475,12.75
  Bottom Layer w0.2: v1(8,14.374) 9.574,14.374 9.9,14.7 9.9,19.3 11.49,20.89 13.241,20.89 13.451,21.1 16.04,21.1 17.28,22.34 J2.6@17.28,22.18
PB8-SCL: J2.7 R16.1 U1.45 | length 22
  Top Layer w0.2: v1(8.9,11.6) 9.3,11.6 9.45,11.75 U1.45 U1.45@11.475,11.75 ; R16.1 v1(17.4,20.2) v1@17.4,20.3
  Bottom Layer w0.2: v1(8.9,11.6) 9,11.6 9.7,12.3 10.266,12.3 11.1,13.134 11.1,18.666 11.934,19.5 16.7,19.5 v1(17.4,20.2) 17.4,20.249 18.351,21.2 18.68,21.2 J2.7@19.82,22.34
PB9-SDA: J2.8 R17.1 U1.46 | length 24.2
  Top Layer w0.2: v1@9.463,10.9 9.5,10.937 v1(9.5,11) 9.75,11.25 U1.46 U1.46@11.475,11.25 ; R17.1 v1(18.2,20.2)
  Bottom Layer w0.2: v1(9.5,11) 9.5,11.5 9.9,11.9 10.431,11.9 11.5,12.969 11.5,18.5 12.1,19.1 17.6,19.1 18.2,19.7 v1(18.2,20.2) 20.22,20.2 J2.8@22.36,22.34
RESET: J3.1 R29.2 U1.7 | length 28.1
  Top Layer w0.2: v1(5.1,11.2) 5.1,10.5 v1(6.9,8.7) ; R29.2@12.25,6.9 12.966,6.9 13.966,7.9 v1(14.5,7.9) 14.9,7.9 15.25,8.25 U1.7 U1.7@15.25,9.475
  Bottom Layer w0.2: J3.1@2.04,19.8 3.6,19.8 4.7,18.7 4.7,17.1 6.7,15.1 6.7,12.8 v1(5.1,11.2) ; v1(6.9,8.7) 7.7,7.9 v1(14.5,7.9)
SI_IRQn: R28.2 R31.2 U2.12 | length 23.8
  Top Layer w0.2: R31.2@9.05,5.9 9.85,5.9 v1(9.85,5.05) ; v1(24.8,13.2) 24.8,12.75 25.3,12.25 U2.12
  Bottom Layer w0.2: v1(9.85,5.05) 10.35,5.05 10.5,5.2 13.649,5.2 13.799,5.05 19.65,5.05 23.1,8.5 23.1,11.5 v1(24.8,13.2)
SI_NSEL: R14.1 U2.16 | length 2.5
  Top Layer w0.2: R14.1@23.9,9.9 24.85,9.9 25.05,10.1 U2.16@26.3,10.1
SI_SCLK: R15.1 U2.13 | length 2.5
  Top Layer w0.2: R15.1@23.9,12.3 24.55,12.3 25.1,11.75 U2.13 U2.13@26.2,11.75
SI_SDI: R19.1 U2.15 | length 2.3
  Top Layer w0.2: R19.1@23.9,10.7 23.95,10.75 U2.15 U2.15@26.2,10.75
SI_SDN: R25.2 U2.2 | length 15.5
  Top Layer w0.2: R25.2@23.9,9.1 23.9,7.1 25.9,5.1 30,5.1 30.4,5.5 30.4,10.15 29.8,10.75 U2.2
SI_SDO: R18.1 U2.14 | length 2.4
  Top Layer w0.2: R18.1@23.9,11.5 24.65,11.5 24.9,11.25 U2.14 U2.14@26.2,11.25
VBAT: C3.1 C4.2 C5.2 C6.2 C7.2 C8.2 J1.1 J3.6 Q1.2 Q2.2 R1.2 R2.2 R7.2 R29.1 U1.1 U1.9 U1.24 U1.36 U1.48 | length 90.9
  Top Layer w0.2: C8.2@10.02,9.62 10.1,9.7 10.1,10 10.35,10.25 U1.48 U1.48@11.475,10.25 ; C6.2 C6.2@10.1,8.85 ; C8.2@10.1,9.5 C6.2@10.1,8.85 ; U1.1@12.25,9.475 U1.1 12.25,8.85 C6.2@10.1,8.85 ; U1.36@12.25,16.525 U1.36@12.255,16.53 ; C7.2 14.951,7 15.151,6.8 15.649,6.8 16.25,7.401 U1.9 U1.9@16.25,9.475
  Top Layer w0.25: C4.2 11.4,16.9 11.525,16.775 U1.36 ; U1.24 19.45,15.75 20.6,16.9
  Top Layer w0.3: C3.1@2.6,1.2 2.8,1 4.35,1 J1.1@4.58,0.77 ; Q2.2 R2.2@8,17.982
  Top Layer w0.35: J3.6@2.04,7.1 3.5,7.1 ; 3.5,8.1 3.5,14.1 5.76,16.36 Q2.2 5.76,20.458 6.296,20.994 10.6,20.994 ; J1.1@4.58,2.02 4.5,2.1 4.5,3.2 4.4,3.3 ; C6.2 10.1,8.3 9.8,8 3.5,8 3.5,7.1 ; C4.2 10.9,18.3 10.7,18.5 10.7,20.994 11.1,20.994 11.281,21.175 20.419,21.175 20.6,20.994 ; R29.1@12.25,5.9 13,5.9 ; C7.2 13.75,7 13,6.25 13,5.9 ; R7.2 20.6,19.6 ; 20.6,16.9 20.6,17.4 ; R1.2@21.4,17.4 20.6,17.4 ; C5.2@21.4,18.2 20.6,18.2 ; Q1.2 24.9,20.6 24.506,20.994 20.6,20.994 ; 3.5,7.1 3.5,4.2 4.4,3.3 ; 4.4,3.3 11.1,3.3 13,5.2 13,5.9 ; 20.6,17.4 20.6,18.2 ; 20.6,18.2 20.6,19.3 20.6,20.994
VDD_EXT: J2.1 Q2.3 | length 2.4
  Top Layer w0.3: J2.1@4.58,22.34 4.58,21.22 4.81,20.99 Q2.3
VDD_RF: C2.2 C22.2 C23.2 C24.2 C25.2 L1.2 L4.2 U2.7 U2.8 | length 11
  Top Layer w0.25: U2.8 27.95,14.25 28.2,14.5 ; C2.2 C2.2@28.2,15.4 ; U2.7 28.45,14.25 28.2,14.5 ; C22.2@29.25,15.3 29.45,15.1 31.25,15.1 L4.2@31.25,13.95 ; C22.2 29.2,15.3 28.3,15.3 C2.2@28.2,15.4 ; C24.2@31.35,15.1 32.25,15.1 C25.2@32.3,15.05 ; 28.2,14.5 C2.2@28.2,15.4
  Top Layer w0.3: L1.2 28.1,16.35 C2.2
VEN_EXT: R4.1 R13.2 | length 0.8
  Top Layer w0.3: R4.1 R13.2
VEN_I2C: R7.1 R16.2 R17.2 U1.25 | length 3.6
  Top Layer w0.25: U1.25 17.75,17.75 17.4,18.1 R16.2 R17.2 R7.1
VEN_RF: R3.1 R23.2 | length 1.3
  Top Layer w0.2: R23.2@22.4,16.6 R3.1
pads on no net: U1.5 U1.6 U1.26 U1.27 U1.28 U1.29 U1.34 U1.37 U1.38 U2.10 U2.11 U2.19 U2.20

## Polygon pours and split planes (outlines as drawn)
GND on Bottom Layer "GND" (solid, remove dead copper, pour order 0): 0,24.4 46.4,24.4 46.4,0 0,0
GND on Top Layer "GND" (solid, remove dead copper, pour order 2): 0,24.4 46.4,24.4 46.4,0 0,0

## Keep-outs
Keep-Out Layer:
  the board outline again, w0.2

## Other copper
Top Layer:
  pour cut-out: 42.15,12.8 42.15,11.2 42.9,11.2 42.9,12.8
  pour cut-out: 26.3,19.1 26.3,17.5 28.8,17.5 28.8,19.1
Bottom Layer:
  rectangle net GND: 12.06,10.047 17.925,15.95
  rectangle net GND: 26.75,10.6 28.65,12.5

## Silkscreen, mask and mechanical layers (free items; w line width, h text height)
Top Overlay:
  text "Oxidane" at 31.6,4.6 h4
  text "Sub-GHz RF module" at 32.6,3.1 h1.5
  text "Rev. A" at 41.1,1.7 h1.5
Bottom Overlay:
  text "VEXT" at 2.5,23.7 h1 r90
  text "PB4" at 10,20.7 h1 r90
  text "PB5" at 12.5,20.7 h1 r90
  text "PB7" at 17.65,20.7 h1 r90
  text "PB8" at 20.1,20.7 h1 r90
  text "PB9" at 22.7,20.7 h1 r90
  text "PB6" at 15.1,20.65 h1 r90
  text "GND" at 7.4,20.5 h1 r90
  text "RESET" at 6.2,19.4 h1
  text "GND" at 5.375,16.9 h1
  text "RX" at 4.665,14.4 h1
  text "TX" at 4.665,11.8 h1
  text "BOOT" at 6.075,9.4 h1
  text "VBAT" at 4.3,8.2 h1 r90
  text "PA12" at 22.56,5.9 h1 r90
  text "PA11" at 20.06,5.87 h1 r90
  text "GND" at 7.4,5.6 h1 r90
  text "PA0" at 9.838,5.418 h1 r90
  text "PA1" at 12.438,5.418 h1 r90
  text "PA2" at 14.938,5.418 h1 r90
  text "PA3" at 17.438,5.388 h1 r90
  text "GND" at 5.475,4.3 h1
  text "VBAT" at 2.5,2.9 h1 r90
Outline:
  the board outline again, w0.2
Drawing:
  text "Mechanical Characteristics" at 126.97,-78.445 h5
Assembly_top:
  text "Assembly TOP" at 126.97,-78.445 h5
Assembly_bot:
  text "Assembly Bottom" at -25.03,-78.445 h5
Note_top:
  text "Note TOP" at 126.97,-78.445 h5
Note_bot:
  text "Note Bottom" at -25.03,-78.445 h5
PCB_Note:
  drawing of 253 lines, arcs and shapes, not listed
  text "Layer" at -66.068,92.6 h2.5
  text "Name" at -49.314,92.6 h2.5
  text "Material" at -10.9,92.6 h2.5
  text "Thickness" at 24.598,92.6 h2.5
  text "Constant" at 51.349,92.6 h2.5
  text "Board Layer Stack" at 74.768,92.6 h2.5
  text "1" at -66.068,87.6 h2.5
  text "Top Overlay" at -49.314,87.6 h2.5
  text "2" at -66.068,82.6 h2.5
  text "Top Solder" at -49.314,82.6 h2.5
  text "Solder Resist" at -10.9,82.6 h2.5
  text "0,010mm" at 24.598,82.6 h2.5
  text "3,5" at 51.349,82.6 h2.5
  text "3" at -66.068,77.6 h2.5
  text "Top Layer" at -49.314,77.6 h2.5
  text "Copper" at -10.9,77.6 h2.5
  text "0,035mm" at 24.598,77.6 h2.5
  text "4" at -66.068,72.6 h2.5
  text "Dielectric1" at -49.314,72.6 h2.5
  text "FR-4" at -10.9,72.6 h2.5
  text "1,500mm" at 24.598,72.6 h2.5
  text "4,2" at 51.349,72.6 h2.5
  text "5" at -66.068,67.6 h2.5
  text "Bottom Layer" at -49.314,67.6 h2.5
  text "Copper" at -10.9,67.6 h2.5
  text "0,035mm" at 24.598,67.6 h2.5
  text "6" at -66.068,62.6 h2.5
  text "Bottom Solder" at -49.314,62.6 h2.5
  text "Solder Resist" at -10.9,62.6 h2.5
  text "0,010mm" at 24.598,62.6 h2.5
  text "3,5" at 51.349,62.6 h2.5
  text "7" at -66.068,57.6 h2.5
  text "Bottom Overlay" at -49.314,57.6 h2.5
  text "File Layer names:" at 90.57,34.055 h3.5
  text "GTO" at 90.57,30.055 h3
  text "Top Overlay" at 99.57,30.055 h3
  text "GTP" at 90.57,27.055 h3
  text "Top Paste" at 99.57,27.055 h3
  text "GTS" at 90.57,24.055 h3
  text "Top Solder" at 99.57,24.055 h3
  text "GTL" at 90.57,21.055 h3
  text "Top Layer" at 99.57,21.055 h3
  text "GBL" at 90.57,18.055 h3
  text "Bottom Layer" at 99.57,18.055 h3
  text "GBS" at 90.57,15.055 h3
  text "Bottom Solder" at 99.57,15.055 h3
  text "GBP" at 90.57,12.055 h3
  text "Bottom Paste" at 99.57,12.055 h3
  text "GBO" at 90.57,9.055 h3
  text "Bottom Overlay" at 99.57,9.055 h3
  text "GM1" at 90.57,3.055 h3
  text "Outline" at 99.57,3.055 h3
  text "GM7" at 90.57,0.055 h3
  text "PCB_Note" at 99.57,0.055 h3
  text "PCB Note" at 126.97,-78.445 h5
  text "Board Name" at 126.97,-81.995 h3
  text ".prj_name" at 142.97,-81.995 h3
  text "Author" at 126.97,-85.495 h3
  text "AUTHOR" at 142.97,-85.495 h3
  text "Date" at 126.97,-89.095 h3
  text ".prj_date" at 142.97,-89.095 h3
  text "Revision" at 126.97,-92.695 h3
  text ".prj_pcb" at 142.97,-92.695 h3
  text "A4" at 185.47,-92.695 h3
TitleBlock_top:
  lines w0.3: 99.47,-93.445 99.47,-74.445 125.97,-74.445 ; 125.97,-93.445 125.97,-81.445 ; 125.97,-89.945 193.47,-89.945 ; 125.97,-86.445 193.47,-86.445 ; 125.97,-82.945 193.47,-82.945 ; 125.97,-81.995 125.97,-79.445 141.97,-79.445 ; 141.97,-93.445 141.97,-89.945 141.97,-86.445 141.97,-82.945 141.97,-79.445 ; 183.47,-93.445 183.47,-89.945 ; 193.47,-79.445 141.97,-79.445 ; -96.53,-98.445 198.47,-98.445 198.47,111.555 -96.53,111.555 -96.53,-98.445 ; -91.53,-93.445 193.47,-93.445 193.47,106.555 -91.53,106.555 -91.53,-93.445
  text "Board Name" at 126.97,-81.995 h3
  text ".prj_name" at 142.97,-81.995 h3
  text "Author" at 126.97,-85.495 h3
  text "AUTHOR" at 142.97,-85.495 h3
  text "Date" at 126.97,-89.095 h3
  text ".prj_date" at 142.97,-89.095 h3
  text "Revision" at 126.97,-92.695 h3
  text ".prj_pcb" at 142.97,-92.695 h3
  text "A4" at 185.47,-92.695 h3
TitleBlock_bot:
  lines w0.3: -91.53,-89.945 -24.03,-89.945 ; -91.53,-86.445 -24.03,-86.445 ; -91.53,-82.945 -24.03,-82.945 ; -91.53,-79.445 -40.03,-79.445 ; -91.53,-74.445 -24.03,-74.445 ; -81.53,-93.445 -81.53,-89.945 ; -40.03,-93.445 -40.03,-89.945 -40.03,-86.445 -40.03,-82.945 -40.03,-79.445 ; -24.03,-93.445 -24.03,-81.445 ; -24.03,-81.995 -24.03,-79.445 ; -6.53,-93.445 193.47,-93.445 ; 2.47,-93.445 2.47,-74.445 -24.03,-74.445 ; -40.03,-79.445 -24.03,-79.445 ; -24.03,-79.445 -24.03,-74.445 ; 193.47,-93.445 -91.53,-93.445 -91.53,106.555 193.47,106.555 193.47,-93.445 ; -96.53,-98.445 198.47,-98.445 198.47,111.555 -96.53,111.555 -96.53,-98.445
  text ".prj_name" at -41.03,-81.995 h3
  text "Board Name" at -25.03,-81.995 h3
  text "AUTHOR" at -41.03,-85.495 h3
  text "Author" at -25.03,-85.495 h3
  text ".prj_date" at -41.03,-89.095 h3
  text "Date" at -25.03,-89.095 h3
  text "A4" at -83.53,-92.695 h3
  text ".prj_pcb" at -41.03,-92.695 h3
  text "Revision" at -25.03,-92.695 h3
Drill Drawing:
  lines w0.254: -61.478,-40.702 -60.006,-40.702 -60.006,-39.23 -61.478,-39.23 -61.478,-40.702 ; -61.478,-37.389 -61.478,-37.021 -61.11,-36.653 -61.478,-36.285 -61.478,-35.916 -61.11,-35.916 -60.742,-36.285 -60.374,-35.916 -60.006,-35.916 -60.006,-36.285 -60.374,-36.653 -60.006,-37.021 -60.006,-37.389 -60.374,-37.389 -60.742,-37.021 -61.11,-37.389 -61.478,-37.389 ; -61.478,-33.708 -61.11,-33.708 -61.11,-34.076 -60.374,-34.076 -60.374,-33.708 -60.006,-33.708 -60.006,-32.971 -60.374,-32.971 -60.374,-32.603 -61.11,-32.603 -61.11,-32.971 -61.478,-32.971 -61.478,-33.708 ; -61.184,-40.408 -60.3,-40.408 -60.3,-39.524 -61.184,-39.524 -61.184,-40.408
  lines w0.381: -62.81,-41.696 78.6,-41.696 ; -62.81,-31.756 78.6,-31.756 ; -53.809,-45.01 -53.809,-28.443 ; -45.753,-45.01 -45.753,-28.443 ; -30.777,-45.01 -30.777,-28.443 ; -23.875,-45.01 -23.875,-28.443 ; -13.884,-45.01 -13.884,-28.443 ; 5.417,-45.01 5.417,-28.443 ; 13.495,-45.01 13.495,-28.443 ; 24.059,-45.01 24.059,-28.443 ; 33.47,-45.01 33.47,-28.443 ; 44.652,-45.01 44.652,-28.443 ; 61.345,-45.01 61.345,-28.443 ; -62.81,-45.01 78.6,-45.01 78.6,-28.443 -62.81,-28.443 -62.81,-45.01
  text "Symbol" at -60.822,-30.762 h1.92
  text "Count" at -52.815,-30.762 h1.92
  text "Hole Size" at -44.759,-30.762 h1.92
  text "Plated" at -29.783,-30.762 h1.92
  text "Hole Type" at -22.881,-30.762 h1.92
  text "Drill Layer Pair" at -12.89,-30.762 h1.92
  text "Via/Pad" at 6.411,-30.762 h1.92
  text "Pad Shape" at 14.489,-30.762 h1.92
  text "Template" at 25.053,-30.762 h1.92
  text "Description" at 34.464,-30.762 h1.92
  text "Hole Tolerance (+)" at 45.646,-30.762 h1.92
  text "Hole Tolerance (-)" at 62.339,-30.762 h1.92
  text "2" at -52.815,-34.076 h1.6
  text "0,500mm (19,69mil)" at -44.759,-34.076 h1.6
  text "PTH" at -29.783,-34.076 h1.6
  text "Round" at -22.881,-34.076 h1.6
  text "Top Layer - Bottom Layer" at -12.89,-34.076 h1.6
  text "Pad" at 6.411,-34.076 h1.6
  text "Rounded" at 14.489,-34.076 h1.6
  text "c90h50" at 25.053,-34.076 h1.6
  text "46" at -52.815,-37.389 h1.6
  text "0,900mm (35,43mil)" at -44.759,-37.389 h1.6
  text "PTH" at -29.783,-37.389 h1.6
  text "Round" at -22.881,-37.389 h1.6
  text "Top Layer - Bottom Layer" at -12.89,-37.389 h1.6
  text "Pad" at 6.411,-37.389 h1.6
  text "(Mixed)" at 14.489,-37.389 h1.6
  text "(Mixed)" at 25.053,-37.389 h1.6
  text "179" at -52.815,-40.702 h1.6
  text "0,300mm (11,81mil)" at -44.759,-40.702 h1.6
  text "PTH" at -29.783,-40.702 h1.6
  text "Round" at -22.881,-40.702 h1.6
  text "Top Layer - Bottom Layer" at -12.89,-40.702 h1.6
  text "Via" at 6.411,-40.702 h1.6
  text "Rounded" at 14.489,-40.702 h1.6
  text "v60h30" at 25.053,-40.702 h1.6
  text "227 Total" at -52.815,-44.016 h1.6

## Dimensions
0,0 to 0,24.4 on Drawing
0,24.4 to 46.4,24.4 on Drawing